# Altium PCB Dashboard_10.0.PcbDoc (part 1 of 3)
Units mm, origin at the board's own origin, x right, y up, seen from the top; angles counter-clockwise.
Board outline 113 x 67 mm, 2 copper layers (Top Layer, Bottom Layer), stack 1.671 mm thick; 178 components, 204 nets, 614 pads, 115 vias.
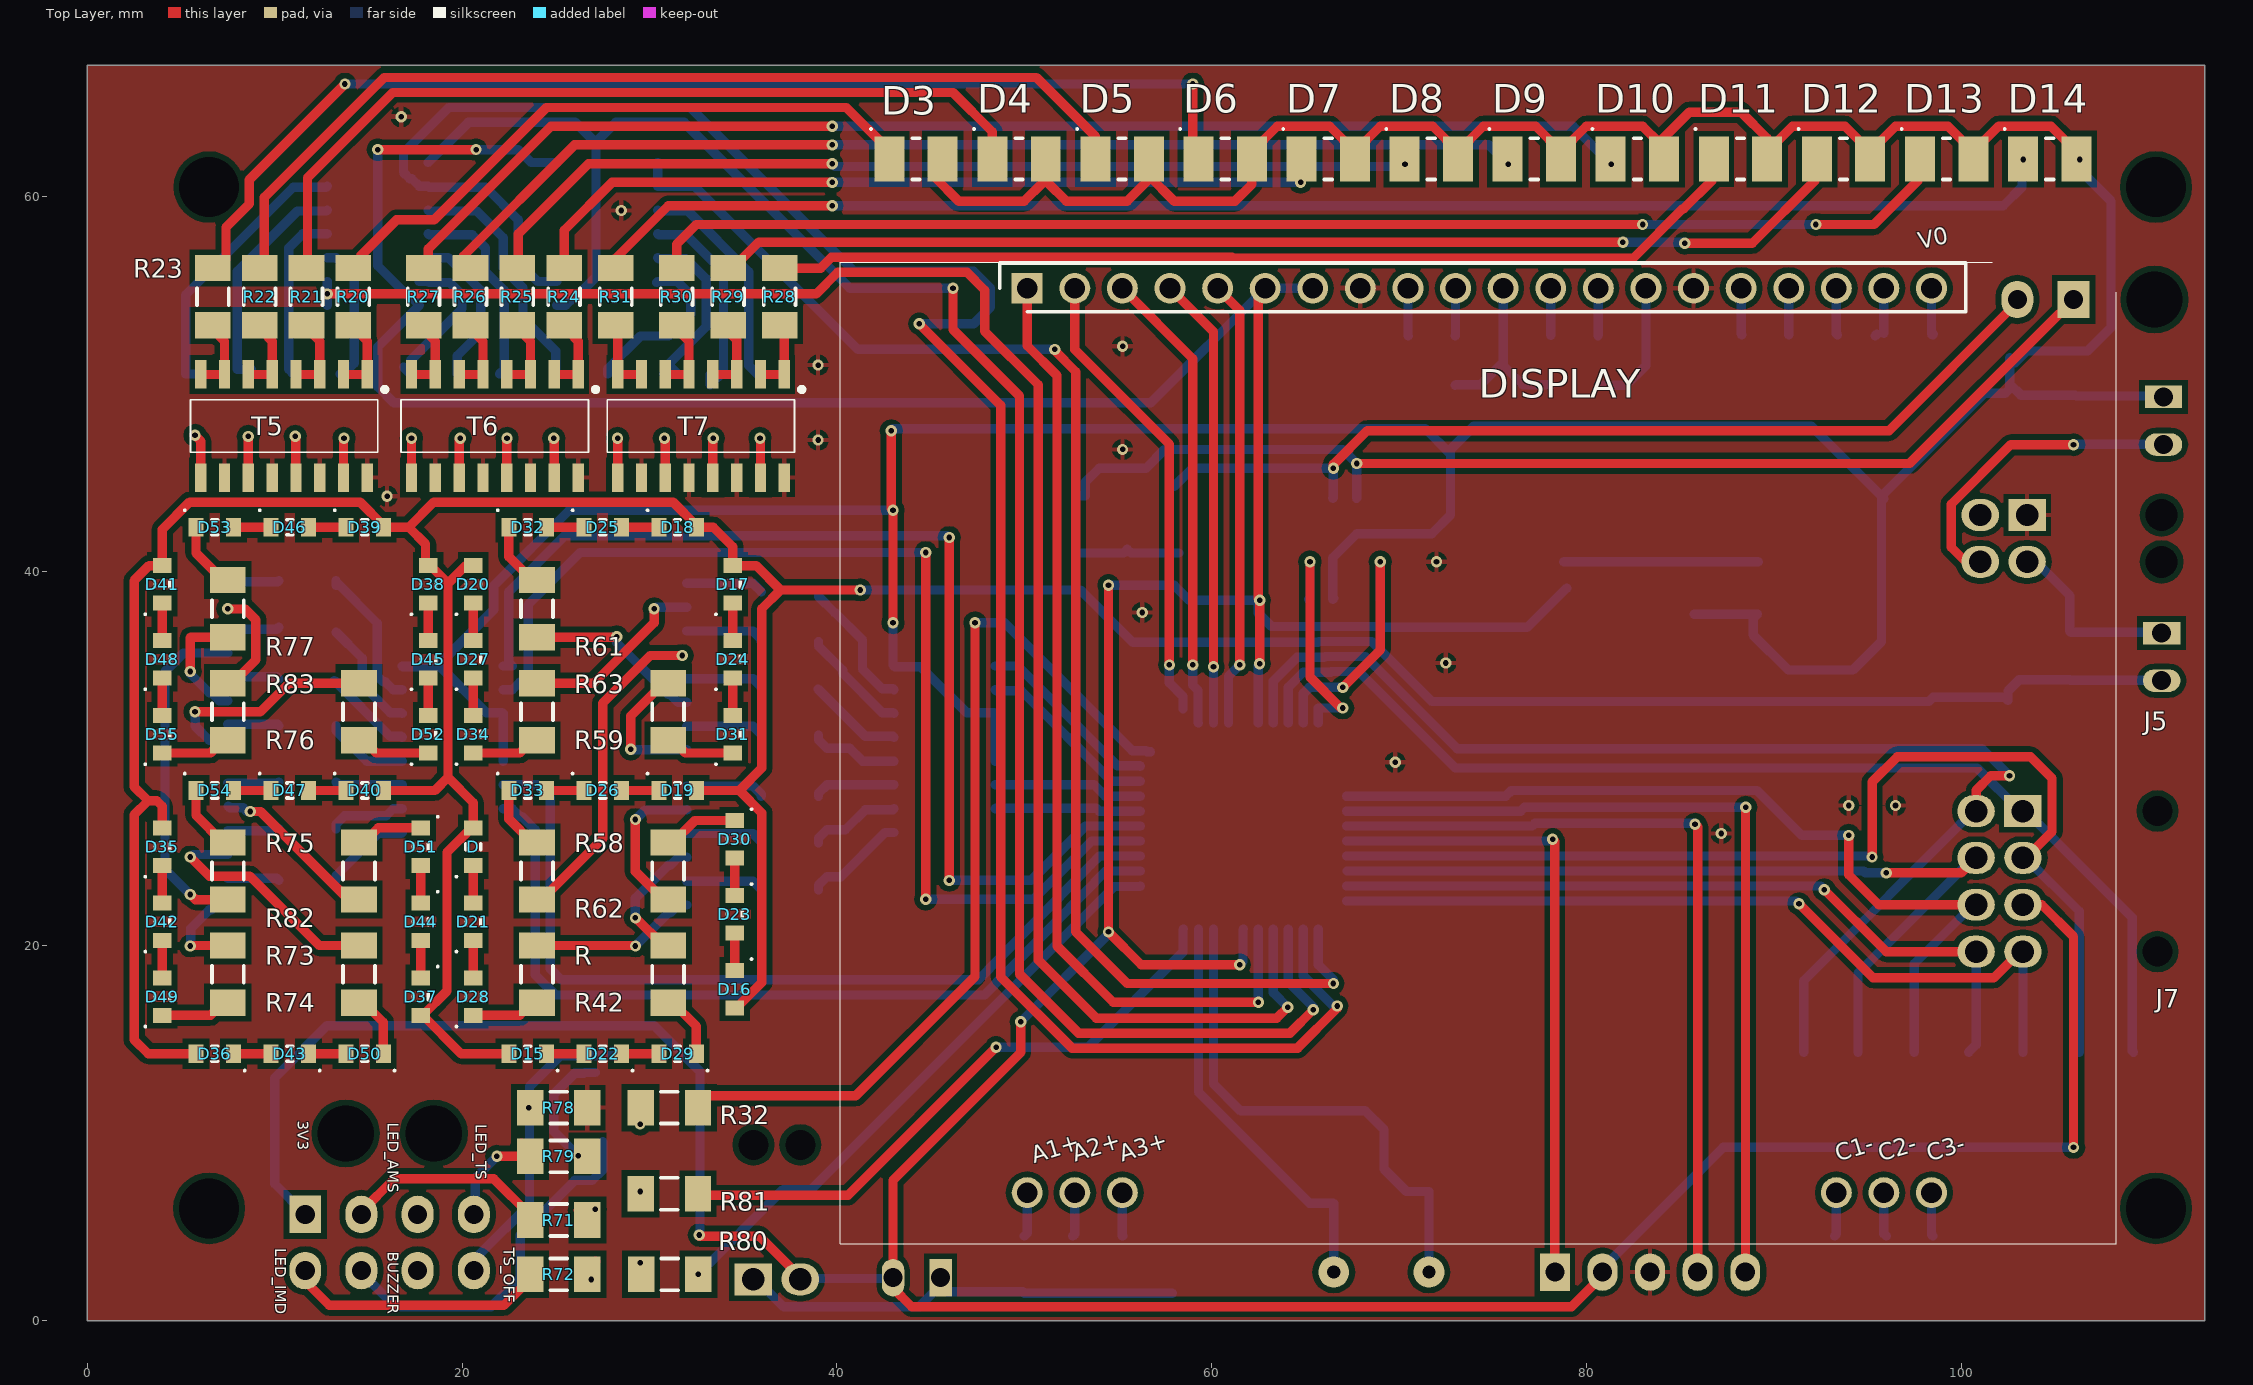
[diagram p0: Top Layer view]
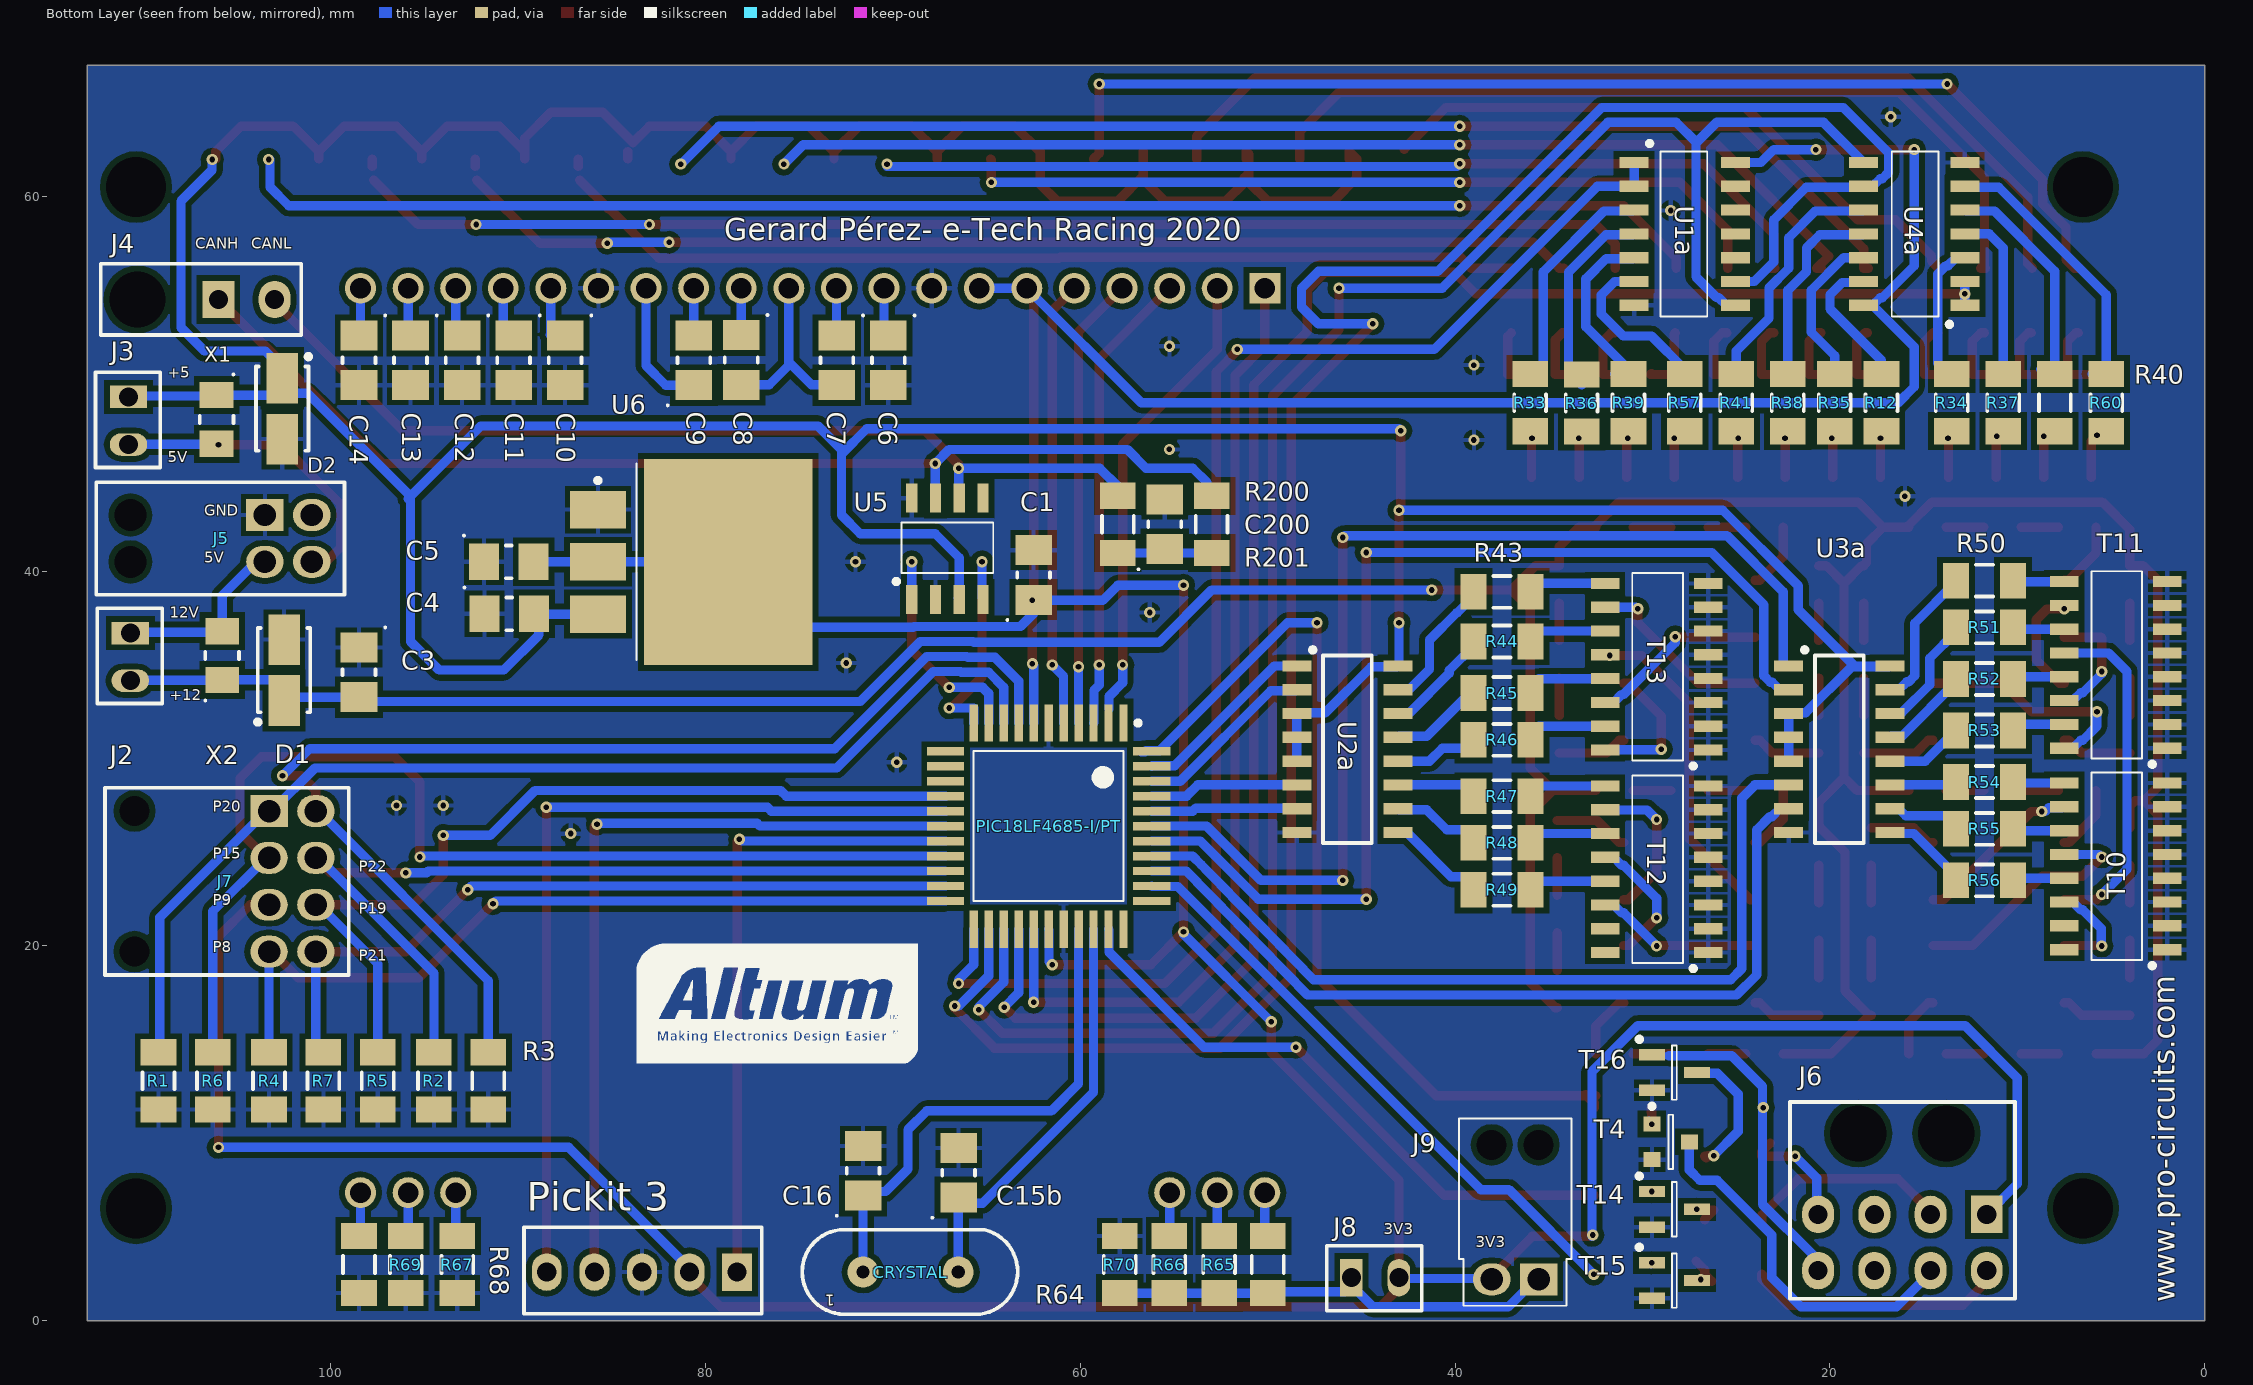
[diagram p1: Bottom Layer view, seen from below]

## Layer stack, top to bottom
Top Solder: solder mask 0.0102, Solder Resist, Dk 3.5
Top Layer: signal copper 0.0356
Dielectric 1: dielectric 1.6, FR-4, Dk 4.8
Bottom Layer: signal copper 0.0356
Bottom Solder: solder mask 0.0102, Solder Resist, Dk 3.5

## Board outline
0,0 113,0 113,67 0,67

## Design rules (kind name [scope] priority, off if disabled: settings)
Clearance [All] p1: gap=0.3 ignorepadtopadclearanceinfootprint=FALSE
HoleSize [All] p1: absolutevalues=TRUE maxlimit=3.3 minlimit=0.025 maxpercent=80.000 minpercent=20.000
MinimumSolderMaskSliver [All] p1: minsoldermaskwidth=0.1
PolygonConnect [All] p1: connectstyle=Relief reliefconductorwidth=0.254 reliefentries=4 polygonreliefangle="90 Angle" airgapwidth=0.254
RoutingVias [All] p1: holewidth=0.3 width=0.6 viastyle="Through Hole" minholewidth=0.3 minwidth=0.6 maxholewidth=0.3 maxwidth=0.6
SilkToSilkClearance [All] p1: silktosilkclearance=0.1
SilkToSolderMaskClearance [IsPad] p1: minsilkscreentomaskgap=0.1 clearancetoexposedcopper=TRUE
SolderMaskExpansion [All] p1: expansion=0.102
Width [All] p1: maxlimit=1 minlimit=0.3 preferedwidth=0.5
26 further rules are at their usual default settings.

## Components (designator, comment, footprint, x,y, rotation, side; value= is the part's Value field where it differs from the comment)
C1 "TAJA105K020RNJ" Chip2PinSM127P600-8N(condensador) 62.5,39.8 r90 bottom
C3 "TAJA105K020RNJ" Chip2PinSM127P600-8N(condensador) 98.5,34.6 r270 bottom
C4 "TAJA105K020RNJ" Chip2PinSM127P600-8N(condensador) 90.475,37.725 r180 bottom
C5 "TAJA105K020RNJ" Chip2PinSM127P600-8N(condensador) 90.5,40.5 r180 bottom
C6 "TAJA105K020RNJ" Chip2PinSM127P600-8N(condensador) 70.25,51.25 r270 bottom
C7 "TAJA105K020RNJ" Chip2PinSM127P600-8N(condensador) 73,51.25 r270 bottom locked
C8 "TAJA105K020RNJ" Chip2PinSM127P600-8N(condensador) 78.1,51.275 r270 bottom locked
C9 "TAJA105K020RNJ" Chip2PinSM127P600-8N(condensador) 80.625,51.25 r90 bottom locked
C10 "TAJA105K020RNJ" Chip2PinSM127P600-8N(condensador) 87.5,51.25 r270 bottom
C11 "TAJA105K020RNJ" Chip2PinSM127P600-8N(condensador) 90.25,51.25 r270 bottom
C12 "TAJA105K020RNJ" Chip2PinSM127P600-8N(condensador) 93,51.25 r270 bottom
C13 "TAJA105K020RNJ" Chip2PinSM127P600-8N(condensador) 95.75,51.25 r270 bottom
C14 "TAJA105K020RNJ" Chip2PinSM127P600-8N(condensador) 98.5,51.25 r270 bottom
C15b "TAJA105K020RNJ" Chip2PinSM127P600-8N(condensador) 66.5,7.9 r90 bottom
C16 "TAJA105K020RNJ" Chip2PinSM127P600-8N(condensador) 71.6,8 r90 bottom
C200 "TAJA105K020RNJ" Chip2PinSM127P600-8N(condensador) 55.5,42.5 r90 bottom
CRYSTAL "CRYSTAL" CRYSTAL 71.6,2.6 r0 bottom
D "150224GS73100" Chip2PinSM127P600-8N 20.6,25.3 r90 top locked
D1 "SMAJ12CA" DIODE 102.375,44.525 r270 bottom
D2 "SMAJ12CA" DIODE 102.725,38.875 r90 bottom
D3 "150141GS73100" Chip2PinSM127P600-8N(Buzz) 44.225,62 r0 top
D4 "150141GS73100" Chip2PinSM127P600-8N(Buzz) 49.725,62 r0 top
D5 "150141GS73100" Chip2PinSM127P600-8N(Buzz) 55.225,62 r0 top
D6 "150141GS73100" Chip2PinSM127P600-8N(Buzz) 60.725,62 r0 top
D7 "150141GS73100" Chip2PinSM127P600-8N(Buzz) 66.225,62 r0 top
D8 "150141GS73100" Chip2PinSM127P600-8N(Buzz) 71.725,62 r0 top
D9 "150141GS73100" Chip2PinSM127P600-8N(Buzz) 77.225,62 r0 top
D10 "150141GS73100" Chip2PinSM127P600-8N(Buzz) 82.725,62 r0 top
D11 "150141GS73100" Chip2PinSM127P600-8N(Buzz) 88.225,62 r0 top
D12 "150141GS73100" Chip2PinSM127P600-8N(Buzz) 93.725,62 r0 top
D13 "150141GS73100" Chip2PinSM127P600-8N(Buzz) 99.225,62 r0 top
D14 "150141GS73100" Chip2PinSM127P600-8N(Buzz) 104.725,62 r0 top
D15 "150224GS73100" Chip2PinSM127P600-8N 23.5,14.25 r180 top locked
D16 "150224GS73100" Chip2PinSM127P600-8N 34.55,17.7 r270 top locked
D17 "150224GS73100" Chip2PinSM127P600-8N 34.45,39.3 r90 top locked
D18 "150224GS73100" Chip2PinSM127P600-8N 31.5,42.35 r0 top locked
D19 "150224GS73100" Chip2PinSM127P600-8N 31.5,28.3 r0 top locked
D20 "150224GS73100" Chip2PinSM127P600-8N 20.6,39.3 r90 top locked
D21 "150224GS73100" Chip2PinSM127P600-8N 20.6,21.3 r90 top locked
D22 "150224GS73100" Chip2PinSM127P600-8N 27.5,14.25 r180 top locked
D23 "150224GS73100" Chip2PinSM127P600-8N 34.55,21.7 r270 top locked
D24 "150224GS73100" Chip2PinSM127P600-8N 34.45,35.3 r90 top locked
D25 "150224GS73100" Chip2PinSM127P600-8N 27.5,42.35 r0 top locked
D26 "150224GS73100" Chip2PinSM127P600-8N 27.5,28.3 r0 top locked
D27 "150224GS73100" Chip2PinSM127P600-8N 20.6,35.3 r90 top locked
D28 "150224GS73100" Chip2PinSM127P600-8N 20.6,17.3 r90 top locked
D29 "150224GS73100" Chip2PinSM127P600-8N 31.5,14.25 r180 top locked
D30 "150224GS73100" Chip2PinSM127P600-8N 34.55,25.7 r270 top locked
D31 "150224GS73100" Chip2PinSM127P600-8N 34.45,31.3 r90 top locked
D32 "150224GS73100" Chip2PinSM127P600-8N 23.5,42.35 r0 top locked
D33 "150224GS73100" Chip2PinSM127P600-8N 23.5,28.3 r0 top locked
D34 "150224GS73100" Chip2PinSM127P600-8N 20.6,31.3 r90 top locked
D35 "150224GS73100" Chip2PinSM127P600-8N 4,25.3 r90 top locked
D36 "150224GS73100" Chip2PinSM127P600-8N 6.8,14.25 r180 top locked
D37 "150224GS73100" Chip2PinSM127P600-8N 17.8,17.3 r270 top locked
D38 "150224GS73100" Chip2PinSM127P600-8N 18.2,39.3 r90 top locked
D39 "150224GS73100" Chip2PinSM127P600-8N 14.8,42.35 r0 top locked
D40 "150224GS73100" Chip2PinSM127P600-8N 14.8,28.3 r0 top locked
D41 "150224GS73100" Chip2PinSM127P600-8N 4,39.3 r90 top locked
D42 "150224GS73100" Chip2PinSM127P600-8N 4,21.3 r90 top locked
D43 "150224GS73100" Chip2PinSM127P600-8N 10.8,14.25 r180 top locked
D44 "150224GS73100" Chip2PinSM127P600-8N 17.8,21.3 r270 top locked
D45 "150224GS73100" Chip2PinSM127P600-8N 18.2,35.3 r90 top locked
D46 "150224GS73100" Chip2PinSM127P600-8N 10.8,42.35 r0 top locked
D47 "150224GS73100" Chip2PinSM127P600-8N 10.8,28.3 r0 top locked
D48 "150224GS73100" Chip2PinSM127P600-8N 4,35.3 r90 top locked
D49 "150224GS73100" Chip2PinSM127P600-8N 4,17.3 r90 top locked
D50 "150224GS73100" Chip2PinSM127P600-8N 14.8,14.25 r180 top locked
D51 "150224GS73100" Chip2PinSM127P600-8N 17.8,25.3 r270 top locked
D52 "150224GS73100" Chip2PinSM127P600-8N 18.2,31.3 r90 top locked
D53 "150224GS73100" Chip2PinSM127P600-8N 6.8,42.35 r0 top locked
D54 "150224GS73100" Chip2PinSM127P600-8N 6.8,28.3 r0 top locked
D55 "150224GS73100" Chip2PinSM127P600-8N 4,31.3 r90 top locked
DISPLAY "M20-7820442" DISPLAY 60.69,46.85 r0 top locked
J2 "68001-202HLF" J2 110.7,36.7 r180 bottom
J3 "68001-202HLF" J3 110.8,49.3 r180 bottom
J4 "43045-0200" J4 106,54.5 r90 bottom
J5 "1053141104" J5 103.52,43 r180 bottom
J6 "43045-0800" J6 11.63,5.675 r270 bottom
J7 "105314-1108" J7 103.3,27.2 r180 bottom
J8 "68001-202HLF" J8 45.54,2.3 r90 bottom
J9 "105313-1202" J9 36.8,5.8 r0 bottom
PIC18LF4685-I/PT "PIC18LF4685-I/PT" TQFP80P1200X1200X120-44N 61.7,26.4 r270 bottom
"Pickit 3" "TLW-105-01-G-S" J1 78.32,2.6 r270 bottom
R "ERJ-8GEYJ151V" ERJ-8GEYJ102V 24,18.5 r270 top locked
R1 "CRCW120610K0JNTA-ND" ERJ-8GEYJ102V 109.2,12.8 r90 bottom
R2 "CRCW120610K0JNTA-ND" ERJ-8GEYJ102V 94.5,12.8 r90 bottom
R3 "CRCW120610K0JNTA-ND" ERJ-8GEYJ102V 91.6,12.8 r90 bottom
R4 "CRCW120610K0JNTA-ND" ERJ-8GEYJ102V 103.3,12.8 r90 bottom
R5 "CRCW120610K0JNTA-ND" ERJ-8GEYJ102V 97.5,12.8 r90 bottom
R6 "CRCW120610K0JNTA-ND" ERJ-8GEYJ102V 106.3,12.8 r90 bottom
R7 "CRCW120610K0JNTA-ND" ERJ-8GEYJ102V 100.4,12.8 r90 bottom
R12 "ERJ-8GEYJ102V" ERJ-8GEYJ102V 17.25,49 r270 bottom
R20 "ERJ-8GEYJ151V" ERJ-8GEYJ102V 14.2,54.65 r270 top
R21 "ERJ-8GEYJ151V" ERJ-8GEYJ102V 11.7,54.65 r270 top
R22 "ERJ-8GEYJ151V" ERJ-8GEYJ102V 9.2,54.65 r270 top
R23 "ERJ-8GEYJ151V" ERJ-8GEYJ102V 6.7,54.65 r270 top
R24 "ERJ-8GEYJ151V" ERJ-8GEYJ102V 25.45,54.65 r270 top
R25 "ERJ-8GEYJ151V" ERJ-8GEYJ102V 22.95,54.65 r270 top
R26 "ERJ-8GEYJ151V" ERJ-8GEYJ102V 20.45,54.65 r270 top
R27 "ERJ-8GEYJ151V" ERJ-8GEYJ102V 17.95,54.65 r270 top
R28 "ERJ-8GEYJ151V" ERJ-8GEYJ102V 36.95,54.65 r270 top
R29 "ERJ-8GEYJ151V" ERJ-8GEYJ102V 34.2,54.65 r270 top
R30 "ERJ-8GEYJ151V" ERJ-8GEYJ102V 31.45,54.65 r270 top
R31 "ERJ-8GEYJ151V" ERJ-8GEYJ102V 28.2,54.65 r270 top
R32 "ERJ-8GEYJ102V" ERJ-8GEYJ102V 31.06,11.375 r180 top
R33 "ERJ-8GEYJ102V" ERJ-8GEYJ102V 36,49 r90 bottom
R34 "ERJ-8GEYJ102V" ERJ-8GEYJ102V 13.5,49 r90 bottom
R35 "ERJ-8GEYJ102V" ERJ-8GEYJ102V 19.75,49 r270 bottom
R36 "ERJ-8GEYJ102V" ERJ-8GEYJ102V 33.25,48.975 r90 bottom
R37 "ERJ-8GEYJ102V" ERJ-8GEYJ102V 10.75,49 r90 bottom
R38 "ERJ-8GEYJ102V" ERJ-8GEYJ102V 22.25,49 r270 bottom
R39 "ERJ-8GEYJ102V" ERJ-8GEYJ102V 30.75,49 r90 bottom
R40 "ERJ-8GEYJ102V" ERJ-8GEYJ102V 8,49 r90 bottom
R41 "ERJ-8GEYJ102V" ERJ-8GEYJ102V 25,49 r270 bottom
R42 "ERJ-8GEYJ151V" ERJ-8GEYJ102V 31,18.5 r270 top locked
R43 "ERJ-8GEYJ102V" ERJ-8GEYJ102V 37.5,38.9 r180 bottom
R44 "ERJ-8GEYJ102V" ERJ-8GEYJ102V 37.5,36.25 r180 bottom
R45 "ERJ-8GEYJ102V" ERJ-8GEYJ102V 37.5,33.5 r180 bottom
R46 "ERJ-8GEYJ102V" ERJ-8GEYJ102V 37.5,31 r180 bottom
R47 "ERJ-8GEYJ102V" ERJ-8GEYJ102V 37.5,28 r180 bottom
R48 "ERJ-8GEYJ102V" ERJ-8GEYJ102V 37.5,25.5 r180 bottom
R49 "ERJ-8GEYJ102V" ERJ-8GEYJ102V 37.5,23 r180 bottom
R50 "ERJ-8GEYJ102V" ERJ-8GEYJ102V 11.75,39.5 r180 bottom
R51 "ERJ-8GEYJ102V" ERJ-8GEYJ102V 11.75,37 r180 bottom
R52 "ERJ-8GEYJ102V" ERJ-8GEYJ102V 11.75,34.25 r180 bottom
R53 "ERJ-8GEYJ102V" ERJ-8GEYJ102V 11.75,31.5 r180 bottom
R54 "ERJ-8GEYJ102V" ERJ-8GEYJ102V 11.75,28.75 r180 bottom
R55 "ERJ-8GEYJ102V" ERJ-8GEYJ102V 11.75,26.25 r180 bottom
R56 "ERJ-8GEYJ102V" ERJ-8GEYJ102V 11.75,23.5 r180 bottom
R57 "ERJ-8GEYJ102V" ERJ-8GEYJ102V 27.75,49 r90 bottom
R58 "ERJ-8GEYJ151V" ERJ-8GEYJ102V 31,24 r90 top locked
R59 "ERJ-8GEYJ151V" ERJ-8GEYJ102V 31,32.5 r270 top locked
R60 "ERJ-8GEYJ102V" ERJ-8GEYJ102V 5.25,49 r90 bottom
R61 "ERJ-8GEYJ151V" ERJ-8GEYJ102V 24,38 r90 top locked
R62 "ERJ-8GEYJ151V" ERJ-8GEYJ102V 24,24 r90 top locked
R63 "ERJ-8GEYJ151V" ERJ-8GEYJ102V 24,32.5 r270 top locked
R64 "ERJ-8GEYJ102V" ERJ-8GEYJ102V 50,3 r90 bottom locked
R65 "ERJ-8GEYJ102V" ERJ-8GEYJ102V 52.6,3 r90 bottom locked
R66 "ERJ-8GEYJ102V" ERJ-8GEYJ102V 55.25,3 r90 bottom locked
R67 "ERJ-8GEYJ102V" ERJ-8GEYJ102V 93.25,3 r270 bottom locked
R68 "ERJ-8GEYJ102V" ERJ-8GEYJ102V 98.5,3 r270 bottom locked
R69 "ERJ-8GEYJ102V" ERJ-8GEYJ102V 96,3 r270 bottom locked
R70 "CRCW120610K0JNTA-ND" ERJ-8GEYJ102V 57.9,3 r90 bottom locked
R71 "ERJ-8GEYJ151V" ERJ-8GEYJ102V 25.16,5.375 r180 top
R72 "ERJ-8GEYJ151V" ERJ-8GEYJ102V 25.16,2.475 r180 top
R73 "ERJ-8GEYJ151V" ERJ-8GEYJ102V 7.5,18.5 r270 top locked
R74 "ERJ-8GEYJ151V" ERJ-8GEYJ102V 14.5,18.5 r270 top locked
R75 "ERJ-8GEYJ151V" ERJ-8GEYJ102V 14.5,24 r90 top locked
R76 "ERJ-8GEYJ151V" ERJ-8GEYJ102V 14.5,32.5 r270 top locked
R77 "ERJ-8GEYJ151V" ERJ-8GEYJ102V 7.5,38 r90 top locked
R78 "CRCW120610K0JNTA-ND" ERJ-8GEYJ102V 25.16,11.375 r180 top
R79 "ERJ-8GEYJ151V" ERJ-8GEYJ102V 25.16,8.775 r180 top
R80 "ERJ-8GEYJ102V" ERJ-8GEYJ102V 31.085,2.475 r180 top
R81 "ERJ-8GEYJ102V" ERJ-8GEYJ102V 31.06,6.775 r180 top
R82 "ERJ-8GEYJ151V" ERJ-8GEYJ102V 7.5,24 r90 top locked
R83 "ERJ-8GEYJ151V" ERJ-8GEYJ102V 7.5,32.5 r270 top locked
R200 "ERJ-8GEYJ151V" ERJ-8GEYJ102V 53,42.5 r270 bottom
R201 "ERJ-8GEYJ151V" ERJ-8GEYJ102V 58,42.5 r270 bottom
T4 "BC817-25LT1G" SOT190P240X100-3N 28.5,9.546 r180 bottom
T5 "MMPQ2222A" SOP127P600-8N(MMPQ2222A) 10.5,47.75 r270 top
T6 "MMPQ2222A" SOP127P600-8N(MMPQ2222A) 21.75,47.75 r270 top
T7 "MMPQ2222A" SOP127P600-8N(MMPQ2222A) 32.75,47.75 r270 top
T10 "MMPQ3906" SOP127P600-8N(MMPQ3906) 4.75,24.25 r0 bottom
T11 "MMPQ3906" SOP127P600-8N(MMPQ3906) 4.75,35 r0 bottom
T12 "MMPQ3906" SOP127P600-8N(MMPQ3906) 29.25,24.095 r0 bottom
T13 "MMPQ3906" SOP127P600-8N(MMPQ3906) 29.25,34.905 r0 bottom
T14 "CPH3455-TL-H" SOT190P280X90-3N 28.3,5.946 r180 bottom
T15 "CPH3455-TL-H" SOT190P280X90-3N 28.3,2.146 r180 bottom
T16 "CPH3455-TL-H" SOT190P280X90-3N 28.3,13.246 r180 bottom
U1a "SN74HC164D" SOP127P600-8N 27.75,58 r180 bottom
U2a "SN74LS47D" SOP127P620X175-16N 45.75,30.5 r180 bottom
U3a "SN74LS47D" SOP127P620X175-16N 19.5,30.5 r180 bottom
U4a "SN74HC164D" SOP127P600-8N 15.5,58 r0 bottom
U5 "MCP2561-I/SN" SOP127P600-8N(MCP2551) 67.1,41.2 r90 bottom
U6 "LT1086CM-3.3" TO228P970-3N 80.75,40.5 r180 bottom
X1 "FUSE 3A" Fuse 104.22,48.3 r90 bottom
X2 "Fuse 1A" Fuse 107.68,35.3 r270 bottom

## Footprints (in the part's own frame and the unit in brackets; to place one, negate y for a bottom-side part, rotate by r counter-clockwise, add the part's x,y. Pads: shape width x height; smd on the part's side, far side on the other; paste and mask are expansions set on the pad)
Chip2PinSM127P600-8N [mm]
  rect 0.8x1 smd: 1(-1,0) 2(1,0)
  silkscreen extent -1.65,-0.4 0.15,0.95, body extent -1.15,-0.7 1.15,0.7, height 1.31
Chip2PinSM127P600-8N(Buzz) [mm]
  rect 1.6x2.4 smd: 1(-1.425,0) 2(1.425,0)
  silkscreen extent -2.45,-1.1 0.2,1.65, body extent -1.75,-1.4 1.75,1.4, height 1.9
Chip2PinSM127P600-8N(condensador) [mm]
  rect 1.6x1.95 smd: 1(-1.325,0) 2(1.325,0)
  silkscreen extent -2.45,-0.87 0.15,1.45, body extent -1.7,-0.9 1.7,0.9, height 1.8
CRYSTAL [mil]
  round 65 hole 27.56: 1(0,0) 2(-200,0)
  silkscreen extent -325,-89 128,89
DIODE [mm]
  rect 2.7x1.68 smd: 1(11.425,-0.125) 2(8.175,-0.125)
  silkscreen extent 7.55,-1.65 12.7,1.27, body extent 7.55,-1.52 12.05,1.27, height 2.29
DISPLAY [mm]
  round 1.65 hole 1.1: 21(37.73,8.25) 22(35.19,8.25) 23(32.65,8.25) 24(30.11,8.25) 25(27.57,8.25) 26(25.03,8.25) 27(22.49,8.25) 28(19.95,8.25) 29(17.41,8.25) 30(14.87,8.25) 31(12.33,8.25) 32(9.79,8.25) 33(7.25,8.25) 34(4.71,8.25) 35(2.17,8.25) 36(-0.37,8.25) 37(-2.91,8.25) 38(-5.45,8.25) 39(-7.99,8.25) 41(-10.53,-40.01) 42(-7.99,-40.01) 43(-5.45,-40.01) 44(37.73,-40.01) 45(35.19,-40.01) 46(32.65,-40.01)
  rect 1.65x1.65 / inner round 1.65 / far side rect 1.65x1.65 hole 1.1: 40(-10.53,8.25)
  silkscreen extent -20.5,-42.75 47.6,9.65
ERJ-8GEYJ102V [mm] "Chip Resistor, 2-Leads, Body 3,20x1,60mm, IPC Medium Density"
  rect 1.4x1.9 smd: 1(-1.525,0) 2(1.525,0)
  silkscreen extent -0.45,-0.85 0.45,0.85, body extent -1.6,-0.8 1.6,0.8, height 0.6
Fuse [mm]
  rect 1.4x1.8 smd: 1(1.1,1.88) 2(-1.5,1.88)
  silkscreen extent -0.4,0.93 2.25,2.78, body extent -2.12,0.98 1.72,2.78, height 1.8
J1 [mm]
  rect 2x1.6 hole 1.02: 1(0,0)
  oval 2x1.6 hole 1.02: 2(0,-2.54) 3(0,-5.08) 4(0,-7.62) 5(0,-10.16)
  silkscreen extent -2.39,-11.38 2.22,1.32
J2 [mm]
  rect 2x1.2 hole 1.02: 1(0,0)
  oval 2x1.2 hole 1.02: 2(0,-2.54)
  silkscreen extent -1.77,-3.76 1.7,1.32
J3 [mm]
  rect 2x1.2 hole 1.02: 1(0,0)
  oval 2x1.2 hole 1.02: 2(0,-2.54)
  silkscreen extent -1.77,-3.76 1.7,1.32
J4 [mm]
  rect 2x1.7 hole 1.02: 1(0,0)
  oval 2x1.7 hole 1.02: 2(0,-3)
  oval 2x1.7 hole 3: 3(0,4.325)
  silkscreen extent -1.9,-4.42 1.91,6.27
J5 [mm]
  rect 2x1.7 hole 1.2: 1(0,0)
  oval 2x1.7 hole 1.2: 2(0,-2.5) 3(2.5,-2.5) 4(2.5,0)
  round 1.5 hole 1.7: 5(-7.18,0) 6(-7.18,-2.5)
  silkscreen extent -9,-4.25 4.25,1.75, body extent -10.38,-4.22 3.02,1.72, height 9.44
J6 [mm]
  rect 2x1.7 hole 1.02: 1(0,0)
  oval 2x1.7 hole 1.02: 2(0,-3) 3(0,-6) 4(0,-9) 5(3,-9) 6(3,-6) 7(3,-3) 8(3,0)
  oval 2x1.7 hole 3: 9(-4.32,-2.16) 10(-4.32,-6.86)
  silkscreen extent -6,-10.5 4.5,1.5
J7 [mm]
  rect 2x1.7 hole 1.2: 1(0,0)
  oval 2x1.7 hole 1.2: 2(0,-2.5) 3(0,-5) 4(0,-7.5) 5(2.5,-7.5) 6(2.5,-5) 7(2.5,-2.5) 8(2.5,0)
  round 1.2 hole 1.6: 9(-7.18,0) 10(-7.18,-7.5)
  silkscreen extent -8.75,-8.75 4.25,1.25, body extent -10.4,-9.26 3,1.68, height 9.44
J8 [mm]
  rect 2x1.2 hole 1.02: 1(0,0)
  oval 2x1.2 hole 1.02: 2(0,-2.54)
  silkscreen extent -1.77,-3.76 1.7,1.32
J9 [mm]
  rect 2x1.7 hole 1.2: 1(-1.25,3.59)
  oval 2x1.7 hole 1.2: 2(1.25,3.59)
  round 1.2 hole 1.6: 5(-1.25,-3.59) 6(1.25,-3.59)
  silkscreen extent -3,-5 3,5, body extent -3.05,-8.25 2.89,3.9, height 6.9
SOP127P600-8N [mm]
  rect 1.55x0.6 smd: 1(-2.7,3.81) 2(-2.7,2.54) 3(-2.7,1.27) 4(-2.7,0) 5(-2.7,-1.27) 6(-2.7,-2.54) 7(-2.7,-3.81) 8(2.7,-3.81) 9(2.7,-2.54) 10(2.7,-1.27) 11(2.7,0) 12(2.7,1.27) 13(2.7,2.54) 14(2.7,3.81)
  silkscreen extent -2,-4.4 1.2,4.95, body extent -2,-4.4 2,4.4, height 1.75
SOP127P600-8N(MCP2551) [mm]
  rect 1.55x0.6 smd: 1(-2.7,1.905) 2(-2.7,0.635) 3(-2.7,-0.635) 4(-2.7,-1.905) 5(2.7,-1.905) 6(2.7,-0.635) 7(2.7,0.635) 8(2.7,1.905)
  silkscreen extent -1.87,-2.45 1.4,2.85, body extent -1.95,-2.45 1.95,2.45, height 1.75
SOP127P600-8N(MMPQ2222A) [mm]
  rect 1.52x0.6 smd: 1(-2.75,4.445) 2(-2.75,3.175) 3(-2.75,1.905) 4(-2.75,0.635) 5(-2.75,-0.635) 6(-2.75,-1.905) 7(-2.75,-3.175) 8(-2.75,-4.445) 9(2.75,-4.445) 10(2.75,-3.175) 11(2.75,-1.905) 12(2.75,-0.635) 13(2.75,0.635) 14(2.75,1.905) 15(2.75,3.175) 16(2.75,4.445)
  silkscreen extent -2.07,-5 1.4,5.5, body extent -2,-5 2,5, height 1.75
SOP127P600-8N(MMPQ3906) [mm]
  rect 1.52x0.6 smd: 1(-2.75,4.445) 2(-2.75,3.175) 3(-2.75,1.905) 4(-2.75,0.635) 5(-2.75,-0.635) 6(-2.75,-1.905) 7(-2.75,-3.175) 8(-2.75,-4.445) 9(2.75,-4.445) 10(2.75,-3.175) 11(2.75,-1.905) 12(2.75,-0.635) 13(2.75,0.635) 14(2.75,1.905) 15(2.75,3.175) 16(2.75,4.445)
  silkscreen extent -2.07,-5 1.3,5.42, body extent -2,-5 2,5, height 1.75
SOP127P620X175-16N [mm] "SOP, 16-Leads, Body 10,00x4,00mm, Pitch 1,27mm, IPC Medium Density"
  rect 1.55x0.6 smd: 1(-2.7,4.445) 2(-2.7,3.175) 3(-2.7,1.905) 4(-2.7,0.635) 5(-2.7,-0.635) 6(-2.7,-1.905) 7(-2.7,-3.175) 8(-2.7,-4.445) 9(2.7,-4.445) 10(2.7,-3.175) 11(2.7,-1.905) 12(2.7,-0.635) 13(2.7,0.635) 14(2.7,1.905) 15(2.7,3.175) 16(2.7,4.445)
  silkscreen extent -1.97,-5 1.3,5.42, body extent -2,-5 2,5, height 1.75
SOT190P240X100-3N [mm] "SOT223, 3-Leads, Body 2,90x2,40mm (avg), Pitch 1,90mm, IPC Medium Density"
  rect 0.9x0.8 smd: 1(-1,0.95) 2(-1,-0.95) 3(1,0)
  silkscreen extent -1.13,-1.45 0.13,2.02, body extent -0.65,-1.45 0.65,1.45, height 1
SOT190P280X90-3N [mm] "SOT223, 3-Leads, Body 2,90x2,80mm (avg), Pitch 1,90mm, IPC Medium Density"
  rect 1.4x0.6 smd: 1(-1.2,0.95) 2(-1.2,-0.95) 3(1.2,0)
  silkscreen extent -2,-1.45 0.13,1.9, body extent -0.8,-1.45 0.8,1.45, height 0.9
TO228P970-3N [mm]
  rect 3x2 smd: 1(-5,-2.79) 2(-5,0) 3(-5,2.79)
  rect 9x11 smd: 4(1.95,0)
  silkscreen extent -5.13,-5.25 -2.95,5.25, body extent -3.8,-5.28 4.28,5.27, height 4.58
TQFP80P1200X1200X120-44N [mm] "TQFP, 44-Leads, Body 10,00x10,00mm, Pitch 0,80mm, IPC Medium Density"
  rect 2x0.45 smd: 1(-5.5,4) 2(-5.5,3.2) 3(-5.5,2.4) 4(-5.5,1.6) 5(-5.5,0.8) 6(-5.5,0) 7(-5.5,-0.8) 8(-5.5,-1.6) 9(-5.5,-2.4) 10(-5.5,-3.2) 11(-5.5,-4) 23(5.5,-4) 24(5.5,-3.2) 25(5.5,-2.4) 26(5.5,-1.6) 27(5.5,-0.8) 28(5.5,0) 29(5.5,0.8) 30(5.5,1.6) 31(5.5,2.4) 32(5.5,3.2) 33(5.5,4)
  rect 0.45x2 smd: 12(-4,-5.5) 13(-3.2,-5.5) 14(-2.4,-5.5) 15(-1.6,-5.5) 16(-0.8,-5.5) 17(0,-5.5) 18(0.8,-5.5) 19(1.6,-5.5) 20(2.4,-5.5) 21(3.2,-5.5) 22(4,-5.5) 34(4,5.5) 35(3.2,5.5) 36(2.4,5.5) 37(1.6,5.5) 38(0.8,5.5) 39(0,5.5) 40(-0.8,5.5) 41(-1.6,5.5) 42(-2.4,5.5) 43(-3.2,5.5) 44(-4,5.5)
  silkscreen extent -5.62,-4 4,4.9, body extent -5,-5 5,5, height 1.2

## Part data
C1 C3 C200: library part "CONDENSADOR 100nF", "CAP TANT 100nF 20V 10% 1206", Capacitance=1uF, Case/Package=1206, Case Code (Metric)=3216, Dielectric Material=Tantalum, ESR (Equivalent Series Resistance)=9R, Leakage Current=500nA, Manufacturer 1="Kyocera AVX", Max Operating Temperature=125°C, Min Operating Temperature=-55°C, Package Quantity=1, Supplier Part Number 1=478-1650-1-ND, Tolerance=20%, Voltage=20V, Case Code (Imperial)=1206, Category=condensador, ComponentLink1Description=https://datasheet.ciiva.com/12883/taj-27497-12883280.pdf?src-supplier=Mouser, ComponentLink1URL=https://datasheet.ciiva.com/12883/taj-27497-12883280.pdf?src-supplier=Mouser, ComponentLink2Description=https://datasheet.ciiva.com/11794/0900766b80ccdc61-11794382.pdf?src-supplier=RSComponents, ComponentLink2URL=https://datasheet.ciiva.com/11794/0900766b80ccdc61-11794382.pdf?src-supplier=RSComponents, ComponentLink3Description=https://datasheet.ciiva.com/263/taj-263412.pdf?src-supplier=Digi-Key, ComponentLink3URL=https://datasheet.ciiva.com/263/taj-263412.pdf?src-supplier=Digi-Key, ComponentLink4Description=https://datasheet.ciiva.com/3004/taj-3004372.pdf?src-supplier=Avnet, ComponentLink4URL=https://datasheet.ciiva.com/3004/taj-3004372.pdf?src-supplier=Avnet, ComponentLink5Description=https://datasheet.ciiva.com/263/taj-263414.pdf?src-supplier=Digi-Key, ComponentLink5URL=https://datasheet.ciiva.com/263/taj-263414.pdf?src-supplier=Digi-Key, ComponentLink6Description=https://datasheet.ciiva.com/263/taj-263413.pdf?src-supplier=Digi-Key, ComponentLink6URL=https://datasheet.ciiva.com/263/taj-263413.pdf?src-supplier=Digi-Key, ComponentLink7Description=https://datasheet.ciiva.com/3004/taj-3004373.pdf?src-supplier=Avnet, ComponentLink7URL=https://datasheet.ciiva.com/3004/taj-3004373.pdf?src-supplier=Avnet, ComponentLink8Description=https://datasheet.ciiva.com/14608/70001050-14608053.pdf?src-supplier=Allied+Electronics, ComponentLink8URL=https://datasheet.ciiva.com/14608/70001050-14608053.pdf?src-supplier=Allied+Electronics, ComponentLink9Description=https://datasheet.ciiva.com/14598/70001050-14598921.pdf?src-supplier=Allied+Electronics, ComponentLink9URL=https://datasheet.ciiva.com/14598/70001050-14598921.pdf?src-supplier=Allied+Electronics, ComponentLink10Description=https://datasheet.ciiva.com/16486/taj-16486073.pdf?src-supplier=Avnet+Asia, ComponentLink10URL=https://datasheet.ciiva.com/16486/taj-16486073.pdf?src-supplier=Avnet+Asia, ComponentLink11Description=https://datasheet.ciiva.com/16203/taj-16203563.pdf?src-supplier=Future+Electronics, ComponentLink11URL=https://datasheet.ciiva.com/16203/taj-16203563.pdf?src-supplier=Future+Electronics, Depth=1.6mm, Dissipation Factor=4%, Features="General Purpose", Height=1.6mm, Height - Seated (Max)=0.071inch, Lead Free="Lead Free", Length=3.2mm, Manufacturer Part Number 1=TAJA105K020RNJ, Mount="Surface Mount,PCB", Number of Pins=2, Packaging="Tape and Reel", Polarity=Polar, Pricing 1="1=0,31000, 10=0,21900, 100=0,13110, 500=0,09832, 1000=0,08303 (USD)", Radiation Hardening=No, REACH SVHC="No SVHC", RoHS=Yes, Stock 1=73338, Supplier 1=Digi-Key, Termination=SMD/SMT, Voltage Rating=20V, Voltage Rating (DC)=20V, Width=1.6mm
C4 C5: library part "CONDENSADOR 10uF", "CAP TANT 10uF 20V 10% 1206", Capacitance=1uF, Case/Package=1206, Case Code (Metric)=3216, Dielectric Material=Tantalum, ESR (Equivalent Series Resistance)=9R, Leakage Current=500nA, Manufacturer 1="Kyocera AVX", Max Operating Temperature=125°C, Min Operating Temperature=-55°C, Package Quantity=1, Supplier Part Number 1=478-1650-1-ND, Tolerance=20%, Voltage=20V, Case Code (Imperial)=1206, Category=condensador, ComponentLink1Description=https://datasheet.ciiva.com/12883/taj-27497-12883280.pdf?src-supplier=Mouser, ComponentLink1URL=https://datasheet.ciiva.com/12883/taj-27497-12883280.pdf?src-supplier=Mouser, ComponentLink2Description=https://datasheet.ciiva.com/11794/0900766b80ccdc61-11794382.pdf?src-supplier=RSComponents, ComponentLink2URL=https://datasheet.ciiva.com/11794/0900766b80ccdc61-11794382.pdf?src-supplier=RSComponents, ComponentLink3Description=https://datasheet.ciiva.com/263/taj-263412.pdf?src-supplier=Digi-Key, ComponentLink3URL=https://datasheet.ciiva.com/263/taj-263412.pdf?src-supplier=Digi-Key, ComponentLink4Description=https://datasheet.ciiva.com/3004/taj-3004372.pdf?src-supplier=Avnet, ComponentLink4URL=https://datasheet.ciiva.com/3004/taj-3004372.pdf?src-supplier=Avnet, ComponentLink5Description=https://datasheet.ciiva.com/263/taj-263414.pdf?src-supplier=Digi-Key, ComponentLink5URL=https://datasheet.ciiva.com/263/taj-263414.pdf?src-supplier=Digi-Key, ComponentLink6Description=https://datasheet.ciiva.com/263/taj-263413.pdf?src-supplier=Digi-Key, ComponentLink6URL=https://datasheet.ciiva.com/263/taj-263413.pdf?src-supplier=Digi-Key, ComponentLink7Description=https://datasheet.ciiva.com/3004/taj-3004373.pdf?src-supplier=Avnet, ComponentLink7URL=https://datasheet.ciiva.com/3004/taj-3004373.pdf?src-supplier=Avnet, ComponentLink8Description=https://datasheet.ciiva.com/14608/70001050-14608053.pdf?src-supplier=Allied+Electronics, ComponentLink8URL=https://datasheet.ciiva.com/14608/70001050-14608053.pdf?src-supplier=Allied+Electronics, ComponentLink9Description=https://datasheet.ciiva.com/14598/70001050-14598921.pdf?src-supplier=Allied+Electronics, ComponentLink9URL=https://datasheet.ciiva.com/14598/70001050-14598921.pdf?src-supplier=Allied+Electronics, ComponentLink10Description=https://datasheet.ciiva.com/16486/taj-16486073.pdf?src-supplier=Avnet+Asia, ComponentLink10URL=https://datasheet.ciiva.com/16486/taj-16486073.pdf?src-supplier=Avnet+Asia, ComponentLink11Description=https://datasheet.ciiva.com/16203/taj-16203563.pdf?src-supplier=Future+Electronics, ComponentLink11URL=https://datasheet.ciiva.com/16203/taj-16203563.pdf?src-supplier=Future+Electronics, Depth=1.6mm, Dissipation Factor=4%, Features="General Purpose", Height=1.6mm, Height - Seated (Max)=0.071inch, Lead Free="Lead Free", Length=3.2mm, Manufacturer Part Number 1=TAJA105K020RNJ, Mount="Surface Mount,PCB", Number of Pins=2, Packaging="Tape and Reel", Polarity=Polar, Pricing 1="1=0,31000, 10=0,21900, 100=0,13110, 500=0,09832, 1000=0,08303 (USD)", Radiation Hardening=No, REACH SVHC="No SVHC", RoHS=Yes, Stock 1=73338, Supplier 1=Digi-Key, Termination=SMD/SMT, Voltage Rating=20V, Voltage Rating (DC)=20V, Width=1.6mm
C6 C7 C8 C9 C10 C11 C12 C13 C14: library part "CONDENSADOR 1uF", "CAP TANT 1uF 20V 10% 1206", Capacitance=1uF, Case/Package=1206, Case Code (Metric)=3216, Dielectric Material=Tantalum, ESR (Equivalent Series Resistance)=9R, Leakage Current=500nA, Manufacturer 1="Kyocera AVX", Max Operating Temperature=125°C, Min Operating Temperature=-55°C, Package Quantity=1, Supplier Part Number 1=478-1650-1-ND, Tolerance=20%, Voltage=20V, Case Code (Imperial)=1206, Category=condensador, ComponentLink1Description=https://datasheet.ciiva.com/12883/taj-27497-12883280.pdf?src-supplier=Mouser, ComponentLink1URL=https://datasheet.ciiva.com/12883/taj-27497-12883280.pdf?src-supplier=Mouser, ComponentLink2Description=https://datasheet.ciiva.com/11794/0900766b80ccdc61-11794382.pdf?src-supplier=RSComponents, ComponentLink2URL=https://datasheet.ciiva.com/11794/0900766b80ccdc61-11794382.pdf?src-supplier=RSComponents, ComponentLink3Description=https://datasheet.ciiva.com/263/taj-263412.pdf?src-supplier=Digi-Key, ComponentLink3URL=https://datasheet.ciiva.com/263/taj-263412.pdf?src-supplier=Digi-Key, ComponentLink4Description=https://datasheet.ciiva.com/3004/taj-3004372.pdf?src-supplier=Avnet, ComponentLink4URL=https://datasheet.ciiva.com/3004/taj-3004372.pdf?src-supplier=Avnet, ComponentLink5Description=https://datasheet.ciiva.com/263/taj-263414.pdf?src-supplier=Digi-Key, ComponentLink5URL=https://datasheet.ciiva.com/263/taj-263414.pdf?src-supplier=Digi-Key, ComponentLink6Description=https://datasheet.ciiva.com/263/taj-263413.pdf?src-supplier=Digi-Key, ComponentLink6URL=https://datasheet.ciiva.com/263/taj-263413.pdf?src-supplier=Digi-Key, ComponentLink7Description=https://datasheet.ciiva.com/3004/taj-3004373.pdf?src-supplier=Avnet, ComponentLink7URL=https://datasheet.ciiva.com/3004/taj-3004373.pdf?src-supplier=Avnet, ComponentLink8Description=https://datasheet.ciiva.com/14608/70001050-14608053.pdf?src-supplier=Allied+Electronics, ComponentLink8URL=https://datasheet.ciiva.com/14608/70001050-14608053.pdf?src-supplier=Allied+Electronics, ComponentLink9Description=https://datasheet.ciiva.com/14598/70001050-14598921.pdf?src-supplier=Allied+Electronics, ComponentLink9URL=https://datasheet.ciiva.com/14598/70001050-14598921.pdf?src-supplier=Allied+Electronics, ComponentLink10Description=https://datasheet.ciiva.com/16486/taj-16486073.pdf?src-supplier=Avnet+Asia, ComponentLink10URL=https://datasheet.ciiva.com/16486/taj-16486073.pdf?src-supplier=Avnet+Asia, ComponentLink11Description=https://datasheet.ciiva.com/16203/taj-16203563.pdf?src-supplier=Future+Electronics, ComponentLink11URL=https://datasheet.ciiva.com/16203/taj-16203563.pdf?src-supplier=Future+Electronics, Depth=1.6mm, Dissipation Factor=4%, Features="General Purpose", Height=1.6mm, Height - Seated (Max)=0.071inch, Lead Free="Lead Free", Length=3.2mm, Manufacturer Part Number 1=TAJA105K020RNJ, Mount="Surface Mount,PCB", Number of Pins=2, Packaging="Tape and Reel", Polarity=Polar, Pricing 1="1=0,31000, 10=0,21900, 100=0,13110, 500=0,09832, 1000=0,08303 (USD)", Radiation Hardening=No, REACH SVHC="No SVHC", RoHS=Yes, Stock 1=73338, Supplier 1=Digi-Key, Termination=SMD/SMT, Voltage Rating=20V, Voltage Rating (DC)=20V, Width=1.6mm
C15b C16: library part "CONDENSADOR 15pF", "CAP TANT 15pF 20V 10% 1206", Capacitance=1uF, Case/Package=1206, Case Code (Metric)=3216, Dielectric Material=Tantalum, ESR (Equivalent Series Resistance)=9R, Leakage Current=500nA, Manufacturer 1="Kyocera AVX", Max Operating Temperature=125°C, Min Operating Temperature=-55°C, Package Quantity=1, Supplier Part Number 1=478-1650-1-ND, Tolerance=20%, Voltage=20V, Case Code (Imperial)=1206, Category=condensador, ComponentLink1Description=https://datasheet.ciiva.com/12883/taj-27497-12883280.pdf?src-supplier=Mouser, ComponentLink1URL=https://datasheet.ciiva.com/12883/taj-27497-12883280.pdf?src-supplier=Mouser, ComponentLink2Description=https://datasheet.ciiva.com/11794/0900766b80ccdc61-11794382.pdf?src-supplier=RSComponents, ComponentLink2URL=https://datasheet.ciiva.com/11794/0900766b80ccdc61-11794382.pdf?src-supplier=RSComponents, ComponentLink3Description=https://datasheet.ciiva.com/263/taj-263412.pdf?src-supplier=Digi-Key, ComponentLink3URL=https://datasheet.ciiva.com/263/taj-263412.pdf?src-supplier=Digi-Key, ComponentLink4Description=https://datasheet.ciiva.com/3004/taj-3004372.pdf?src-supplier=Avnet, ComponentLink4URL=https://datasheet.ciiva.com/3004/taj-3004372.pdf?src-supplier=Avnet, ComponentLink5Description=https://datasheet.ciiva.com/263/taj-263414.pdf?src-supplier=Digi-Key, ComponentLink5URL=https://datasheet.ciiva.com/263/taj-263414.pdf?src-supplier=Digi-Key, ComponentLink6Description=https://datasheet.ciiva.com/263/taj-263413.pdf?src-supplier=Digi-Key, ComponentLink6URL=https://datasheet.ciiva.com/263/taj-263413.pdf?src-supplier=Digi-Key, ComponentLink7Description=https://datasheet.ciiva.com/3004/taj-3004373.pdf?src-supplier=Avnet, ComponentLink7URL=https://datasheet.ciiva.com/3004/taj-3004373.pdf?src-supplier=Avnet, ComponentLink8Description=https://datasheet.ciiva.com/14608/70001050-14608053.pdf?src-supplier=Allied+Electronics, ComponentLink8URL=https://datasheet.ciiva.com/14608/70001050-14608053.pdf?src-supplier=Allied+Electronics, ComponentLink9Description=https://datasheet.ciiva.com/14598/70001050-14598921.pdf?src-supplier=Allied+Electronics, ComponentLink9URL=https://datasheet.ciiva.com/14598/70001050-14598921.pdf?src-supplier=Allied+Electronics, ComponentLink10Description=https://datasheet.ciiva.com/16486/taj-16486073.pdf?src-supplier=Avnet+Asia, ComponentLink10URL=https://datasheet.ciiva.com/16486/taj-16486073.pdf?src-supplier=Avnet+Asia, ComponentLink11Description=https://datasheet.ciiva.com/16203/taj-16203563.pdf?src-supplier=Future+Electronics, ComponentLink11URL=https://datasheet.ciiva.com/16203/taj-16203563.pdf?src-supplier=Future+Electronics, Depth=1.6mm, Dissipation Factor=4%, Features="General Purpose", Height=1.6mm, Height - Seated (Max)=0.071inch, Lead Free="Lead Free", Length=3.2mm, Manufacturer Part Number 1=TAJA105K020RNJ, Mount="Surface Mount,PCB", Number of Pins=2, Packaging="Tape and Reel", Polarity=Polar, Pricing 1="1=0,31000, 10=0,21900, 100=0,13110, 500=0,09832, 1000=0,08303 (USD)", Radiation Hardening=No, REACH SVHC="No SVHC", RoHS=Yes, Stock 1=73338, Supplier 1=Digi-Key, Termination=SMD/SMT, Voltage Rating=20V, Voltage Rating (DC)=20V, Width=1.6mm
D D15 D16 D17 D18 D19 D20 D21 D22 D23 D24 D25 D26 D27 D28 D29 D30 D31 D32 D33 D34 D35 D36 D37 D38 D39 D40 D41 D42 D43 D44 D45 D46 D47 D48 D49 D50 D51 D52 D53 D54 D55: library part LED_SEG, "LED GREEN CLEAR 2SMD 528NM", Manufacturer 1="Wurth Electronics", Supplier Part Number 1=732-11398-1-ND, ComponentLink1Description=https://katalog.we-online.de/led/datasheet/150224GS73100.pdf?src-supplier=Digi-Key, ComponentLink1URL=https://katalog.we-online.de/led/datasheet/150224GS73100.pdf?src-supplier=Digi-Key, Manufacturer Part Number 1=150224GS73100, Pricing 1="1=0,71000, 50=0,58400, 100=0,41800, 500=0,38100 (USD)", RoHS=No, Stock 1=697, Supplier 1=Digi-Key
D1 D2: library part DIODE, "TVS DIODE 12V 19.9V DO214AC", Breakdown Voltage=13.3V, Capacitance=800pF, Case/Package=SMA, Clamping Voltage=19.9V, Leakage Current=1uA, Manufacturer 1=Littelfuse, Max Breakdown Voltage=14.7V, Max Operating Temperature=150°C, Max Output Current=20.1A, Max Power Dissipation=3.3W, Min Operating Temperature=-65°C, Operating Supply Voltage=12V, Package Quantity=5000, Peak Pulse Power=400W, Power Line Protection=No, Supplier Part Number 1=SMAJ12CALFCT-ND, Test Current=1mA, Category=Diode, ComponentLink1Description=https://datasheet.ciiva.com/14162/smaj-eng-ds-14162034.pdf?src-supplier=Distrelec, ComponentLink1URL=https://datasheet.ciiva.com/14162/smaj-eng-ds-14162034.pdf?src-supplier=Distrelec, ComponentLink2Description=https://datasheet.ciiva.com/25624/0900766b810f4edb-25624831.pdf?src-supplier=RSComponents, ComponentLink2URL=https://datasheet.ciiva.com/25624/0900766b810f4edb-25624831.pdf?src-supplier=RSComponents, ComponentLink3Description=https://datasheet.ciiva.com/331/littelfuse-tvs-diode-smaj-datasheet-pdf-331080.pdf?src-supplier=Digi-Key, ComponentLink3URL=https://datasheet.ciiva.com/331/littelfuse-tvs-diode-smaj-datasheet-pdf-331080.pdf?src-supplier=Digi-Key, ComponentLink4Description=https://datasheet.ciiva.com/8062/littelfuse-tvs-diode-smaj-8062265.pdf?src-supplier=Element14, ComponentLink4URL=https://datasheet.ciiva.com/8062/littelfuse-tvs-diode-smaj-8062265.pdf?src-supplier=Element14, ComponentLink5Description=https://datasheet.ciiva.com/4511/littelfuse-tvs-diode-smaj-23503-4511037.pdf?src-supplier=Mouser, ComponentLink5URL=https://datasheet.ciiva.com/4511/littelfuse-tvs-diode-smaj-23503-4511037.pdf?src-supplier=Mouser, ComponentLink6Description=https://datasheet.ciiva.com/28473/607617-28473381.pdf?src-supplier=Element14, ComponentLink6URL=https://datasheet.ciiva.com/28473/607617-28473381.pdf?src-supplier=Element14, ComponentLink7Description=https://datasheet.ciiva.com/331/littelfuse-tvs-diode-smaj-datasheet-pdf-331078.pdf?src-supplier=Digi-Key, ComponentLink7URL=https://datasheet.ciiva.com/331/littelfuse-tvs-diode-smaj-datasheet-pdf-331078.pdf?src-supplier=Digi-Key, ComponentLink8Description=https://datasheet.ciiva.com/331/littelfuse-tvs-diode-smaj-datasheet-pdf-331079.pdf?src-supplier=Digi-Key, ComponentLink8URL=https://datasheet.ciiva.com/331/littelfuse-tvs-diode-smaj-datasheet-pdf-331079.pdf?src-supplier=Digi-Key, Composition=Zener, Direction=Bidirectional, Element Configuration=Single, Height=2.087mm, Lead Free="Lead Free", Length=4.5mm, Manufacturer Part Number 1=SMAJ12CA, Max Reverse Leakage Current=1uA, Max Surge Current=20.1A, Min Breakdown Voltage=13.3V, Mount="Surface Mount", Number of Bidirectional Channels=1, Number of Channels=1, Number of Elements=1, Number of Pins=2, Packaging="Tape and Reel", Peak Pulse Current=20.1A, Polarity=Bidirectional, Power Dissipation=400W, Pricing 1="1=0,45000, 10=0,33900, 25=0,30520, 100=0,16100, 250=0,15928, 500=0,14264, 1000=0,11100, 2500=0,10156 (USD)", Radiation Hardening=No, REACH SVHC="No SVHC", Reverse Breakdown Voltage=13.3V, Reverse Standoff Voltage=12V, RoHS=Yes, Stock 1=18116, Supplier 1=Digi-Key, Termination=SMD/SMT, Voltage Rating (DC)=12V, Width=2.79mm
D3 D4 D5 D6 D7 D8 D9 D10 D11 D12 D13 D14: library part LED, "WURTH ELEKTRONIK   150141GS73100   LED, 1411, GREEN, 1000MCD, 525NM", Case/Package=3528, Case Code (Imperial)=1411, Color=Green, Forward Current=30mA, Forward Voltage=3.1V, Manufacturer 1="Wurth Electronics", Max Operating Temperature=85°C, Min Operating Temperature=-40°C, Package Quantity=2000, Supplier Part Number 1=732-4997-1-ND, Test Current=20mA, Case Code (Metric)=3528, ComponentLink1Description=https://datasheet.ciiva.com/23843/150141gs73100-23843266.pdf?src-supplier=Newark, ComponentLink1URL=https://datasheet.ciiva.com/23843/150141gs73100-23843266.pdf?src-supplier=Newark, ComponentLink2Description=https://datasheet.ciiva.com/29278/759463-da-01-en-smd-topled-einf-gruen-150141gs73100-29278953.pdf?src-supplier=Conrad, ComponentLink2URL=https://datasheet.ciiva.com/29278/759463-da-01-en-smd-topled-einf-gruen-150141gs73100-29278953.pdf?src-supplier=Conrad, ComponentLink3Description=https://datasheet.ciiva.com/22656/1911484-22656997.pdf?src-supplier=Element14, ComponentLink3URL=https://datasheet.ciiva.com/22656/1911484-22656997.pdf?src-supplier=Element14, ComponentLink4Description=https://datasheet.ciiva.com/29563/150141gs73100-29563029.pdf?src-supplier=Digi-Key, ComponentLink4URL=https://datasheet.ciiva.com/29563/150141gs73100-29563029.pdf?src-supplier=Digi-Key, ComponentLink5Description=https://datasheet.ciiva.com/29563/150141gs73100-29563030.pdf?src-supplier=Digi-Key, ComponentLink5URL=https://datasheet.ciiva.com/29563/150141gs73100-29563030.pdf?src-supplier=Digi-Key, ComponentLink6Description=https://datasheet.ciiva.com/48430/150141gs73100-eng-tds-48430060.pdf?src-supplier=Distrelec, ComponentLink6URL=https://datasheet.ciiva.com/48430/150141gs73100-eng-tds-48430060.pdf?src-supplier=Distrelec, Dominant Wavelength=525nm, Height=1.9mm, Lead Free="Lead Free", Length=3.5mm, Lens Style=Clear,Round, Luminous Intensity=1000mcd, Manufacturer Part Number 1=150141GS73100, Mount="Surface Mount", Packaging="Cut Tape", Pricing 1="1=0,18000, 50=0,17600, 100=0,15300, 500=0,11700 (USD)", REACH SVHC=Unknown, RoHS=Yes, Stock 1=10639, Supplier 1=Digi-Key, Viewing Angle=120°, Wavelength=525nm, Width=2.8mm
DISPLAY: library part DISPLAY, "2.54mm (0.1\") Pitch SIL Vertical PC Tail Socket Assembly, selective gold + tin, 4 contacts", Case/Package=SIL, Color=Black, Contact Resistance=20mR, Manufacturer 1=Harwin, Max Current Rating=3A, Max Operating Temperature=105°C, Min Operating Temperature=-40°C, Package Quantity=56, Supplier Part Number 1=952-1791-ND, ComponentLink1Description=DATASHEET, ComponentLink1URL=https://eu.mouser.com/datasheet/2/127/dogl128-6e-3984.pdf, ComponentLink2Description="WHERE BUY IT", ComponentLink2URL=https://eu.mouser.com/productdetail/electronic-assembly/ea-led68x51-w?qs=7%252buJNxjmPmV34T7aeje2sQ==, Connector Type=Receptacle,Socket, Contact Gender=Female, Contact Material=Bronze, Contact Plating=Gold,Tin, Depth=2.5mm, Gender=Female, Housing Color=Black, Housing Material=Nylon, Length=10.56mm, Manufacturer Part Number 1=M20-7820442, Mount="Through Hole", Number of Contacts=4, Number of Positions=4, Number of Rows=1, Orientation=Straight, Packaging=Rail/Tube, Pitch=2.54mm, Pricing 1="1=0,81000, 10=0,71400, 100=0,61600, 500=0,50400, 1000=0,44800, 5000=0,39200, 10000=0,37240 (USD)", Radiation Hardening=No, RoHS=Yes, Stock 1=903, Supplier 1=Digi-Key, Termination=Solder, Weight=0.012699oz
J2 J3 J8: library part HEADER, "CONN HEADER VERT 2POS 2.54MM", Color=Black, Current Rating=3A, Flammability Rating="UL94 V-0", Insulation Resistance=5GR, Manufacturer 1="Amphenol FCI", Max Operating Temperature=125°C, Max Voltage Rating (AC)=1.5kV, Min Operating Temperature=-65°C, Package Quantity=100, Supplier Part Number 1=609-3469-ND, Category=Connector, ComponentLink1Description=https://datasheet.ciiva.com/5155/68000-274330-5155060.pdf?src-supplier=Mouser, ComponentLink1URL=https://datasheet.ciiva.com/5155/68000-274330-5155060.pdf?src-supplier=Mouser, ComponentLink2Description=https://datasheet.ciiva.com/16726/68000-16726182.pdf?src-supplier=Avnet+Europe, ComponentLink2URL=https://datasheet.ciiva.com/16726/68000-16726182.pdf?src-supplier=Avnet+Europe, ComponentLink3Description=https://datasheet.ciiva.com/10149/68000-10149336.pdf?src-supplier=Avnet, ComponentLink3URL=https://datasheet.ciiva.com/10149/68000-10149336.pdf?src-supplier=Avnet, ComponentLink4Description=https://datasheet.ciiva.com/731/68000-731070.pdf?src-supplier=Digi-Key, ComponentLink4URL=https://datasheet.ciiva.com/731/68000-731070.pdf?src-supplier=Digi-Key, Connector Type="Male Pin", Contact Gender=Male, Contact Material=Bronze, Contact Mating Length=0.23inch, Contact Plating=Gold,GXT, Contact Post Length=3.05mm, Depth=2.41mm, Gender=Male, Housing Color=Black, Housing Material=Thermoplastic, Length=5.08mm, Manufacturer Part Number 1=68001-202HLF, Mount="Through Hole", Number of Contacts=2, Number of Positions=2, Number of Rows=1, Orientation=Straight, Packaging=Bulk, Pitch=2.54mm, Pricing 1="1=0,24000, 10=0,22100, 100=0,15290, 500=0,12936, 1000=0,10584, 5000=0,09408, 10000=0,08526 (USD)", Radiation Hardening=No, REACH SVHC="No SVHC", RoHS=Yes, Stock 1=39971, Supplier 1=Digi-Key, Termination=Solder, Voltage Rating=1.5kV
J4: library part HEADER_J4, "CONN HEADER R/A 2POS", Case/Package=SMC, Color=Black, Contact Resistance=10mR, Current Rating=5A, Flammability Rating="UL94 V-0", Insulation Resistance=1GR, Manufacturer 1=Molex, Max Operating Temperature=105°C, Max Voltage Rating (DC)=250.25kV, Min Operating Temperature=-40°C, Package Quantity=3168, Supplier Part Number 1=WM1813-ND, Voltage Rating=600V, Voltage Rating (DC)=250V, Approvals=UL,CSA,TUV, ComponentLink1Description=https://datasheet.ciiva.com/14155/04402310-14155203.pdf?src-supplier=Distrelec, ComponentLink1URL=https://datasheet.ciiva.com/14155/04402310-14155203.pdf?src-supplier=Distrelec, ComponentLink2Description=https://datasheet.ciiva.com/19454/883270-19454006.pdf?src-supplier=Jameco, ComponentLink2URL=https://datasheet.ciiva.com/19454/883270-19454006.pdf?src-supplier=Jameco, ComponentLink3Description=https://datasheet.ciiva.com/5150/0430450200-pcb-headers-145770-5150407.pdf?src-supplier=Mouser, ComponentLink3URL=https://datasheet.ciiva.com/5150/0430450200-pcb-headers-145770-5150407.pdf?src-supplier=Mouser, ComponentLink4Description=https://datasheet.ciiva.com/11747/0900766b80027348-11747001.pdf?src-supplier=RSComponents, ComponentLink4URL=https://datasheet.ciiva.com/11747/0900766b80027348-11747001.pdf?src-supplier=RSComponents, ComponentLink5Description=https://datasheet.ciiva.com/16656/0430450200-pcb-headers-16656330.pdf?src-supplier=Avnet+Europe, ComponentLink5URL=https://datasheet.ciiva.com/16656/0430450200-pcb-headers-16656330.pdf?src-supplier=Avnet+Europe, ComponentLink6Description=https://datasheet.ciiva.com/10090/0430450200-pcb-headers-10090299.pdf?src-supplier=Avnet, ComponentLink6URL=https://datasheet.ciiva.com/10090/0430450200-pcb-headers-10090299.pdf?src-supplier=Avnet, ComponentLink7Description=https://datasheet.ciiva.com/36854/124280430450200-pcb-headers-36854331.pdf?src-supplier=Onlinecomponents.com, ComponentLink7URL=https://datasheet.ciiva.com/36854/124280430450200-pcb-headers-36854331.pdf?src-supplier=Onlinecomponents.com, ComponentLink8Description=https://datasheet.ciiva.com/1443/1859921-1443437.pdf?src-supplier=Element14, ComponentLink8URL=https://datasheet.ciiva.com/1443/1859921-1443437.pdf?src-supplier=Element14, Contact Gender=Male, Contact Material=Brass,Tin, Contact Plating=Tin, Diameter=3mm, Gender=Male, Glow Wire Compliant=Compliant, Halogen Free="Low Halogen", Housing Color=Black, Housing Material=Thermoplastic, Lead Free="Lead Free", Manufacturer Part Number 1=43045-0200, Material=Thermoplastic, Mount="Through Hole", Number of Circuits=2, Number of Contacts=2, Number of Positions=2, Number of Rows=2, Orientation="Right Angle", Packaging=Tray, Pitch=3mm, Pricing 1="1=0,97000, 10=0,84900, 100=0,73280, 500=0,59958, 1000=0,53296, 5000=0,46634, 10000=0,44302 (USD)", Radiation Hardening=No, REACH SVHC=Unknown, RoHS=Yes, Row Spacing=3mm, Stock 1=6359, Supplier 1=Digi-Key, Termination="Through Hole"
J5: library part HEADER_J5, "NANO-FIT RIGHT ANGLE HEADER, TH", Insulation Color=Black, Manufacturer 1=Molex, Max Operating Temperature=105°C, Min Operating Temperature=-40°C, Supplier Part Number 1=WM16907-ND, ComponentLink1Description=https://www.molex.com/pdm_docs/ps/PS-105300-100-001.pdf?src-supplier=Digi-Key, ComponentLink1URL=https://www.molex.com/pdm_docs/ps/PS-105300-100-001.pdf?src-supplier=Digi-Key, Connector Type="Header,Male Pin", Contact Material=Brass, Contact Plating=Tin, Contact Shape=Square, Fastening Type=Latch, Insulation Material=Polymer, Manufacturer Part Number 1=1053141104, Mount="Through Hole", Number of Positions=4, Number of Rows=2, Packaging=Tray, Pricing 1="1=1,08000, 10=0,95100, 300=0,74580, 600=0,67122, 1200=0,59664, 5100=0,52206, 10200=0,49596 (USD)", RoHS=No, Stock 1=1022, Supplier 1=Digi-Key, Termination=Solder
J6: library part HEADER_J6, "CONN HEADER R/A 8POS 3MM", Case/Package=SMC, Color=Black, Contact Resistance=10mR, Current Rating=5A, Flammability Rating="UL94 V-0", Insulation Resistance=1GR, Manufacturer 1=Molex, Max Operating Temperature=105°C, Max Voltage Rating (DC)=250.25kV, Min Operating Temperature=-40°C, Package Quantity=1440, Supplier Part Number 1=WM1816-ND, Voltage Rating=600V, Voltage Rating (AC)=250V, Approvals=UL,CSA,TUV, ComponentLink1Description=https://datasheet.ciiva.com/5158/0430450800-pcb-headers-142625-5158817.pdf?src-supplier=Mouser, ComponentLink1URL=https://datasheet.ciiva.com/5158/0430450800-pcb-headers-142625-5158817.pdf?src-supplier=Mouser, ComponentLink2Description=https://datasheet.ciiva.com/7683/27645-7683683.pdf?src-supplier=Element14, ComponentLink2URL=https://datasheet.ciiva.com/7683/27645-7683683.pdf?src-supplier=Element14, ComponentLink3Description=https://datasheet.ciiva.com/19462/883536-19462164.pdf?src-supplier=Jameco, ComponentLink3URL=https://datasheet.ciiva.com/19462/883536-19462164.pdf?src-supplier=Jameco, ComponentLink4Description=https://datasheet.ciiva.com/11751/0900766b80027348-11751142.pdf?src-supplier=RSComponents, ComponentLink4URL=https://datasheet.ciiva.com/11751/0900766b80027348-11751142.pdf?src-supplier=RSComponents, ComponentLink5Description=https://datasheet.ciiva.com/30198/267770430450800-pcb-headers-30198875.pdf?src-supplier=Onlinecomponents.com, ComponentLink5URL=https://datasheet.ciiva.com/30198/267770430450800-pcb-headers-30198875.pdf?src-supplier=Onlinecomponents.com, ComponentLink6Description=https://datasheet.ciiva.com/1443/1850016-1443537.pdf?src-supplier=Element14, ComponentLink6URL=https://datasheet.ciiva.com/1443/1850016-1443537.pdf?src-supplier=Element14, ComponentLink7Description=https://datasheet.ciiva.com/14155/04402310-14155206.pdf?src-supplier=Distrelec, ComponentLink7URL=https://datasheet.ciiva.com/14155/04402310-14155206.pdf?src-supplier=Distrelec, ComponentLink8Description=https://datasheet.ciiva.com/16657/0430450800-pcb-headers-16657964.pdf?src-supplier=Avnet+Europe, ComponentLink8URL=https://datasheet.ciiva.com/16657/0430450800-pcb-headers-16657964.pdf?src-supplier=Avnet+Europe, ComponentLink9Description=https://datasheet.ciiva.com/10087/0430450800-pcb-headers-10087853.pdf?src-supplier=Avnet, ComponentLink9URL=https://datasheet.ciiva.com/10087/0430450800-pcb-headers-10087853.pdf?src-supplier=Avnet, Contact Material=Brass,Tin, Contact Plating=Tin, Depth=12.2mm, Diameter=3mm, Gender=Male, Glow Wire Compliant=Compliant, Halogen Free="Low Halogen", Height=8.77mm, Housing Color=Black, Housing Material=Thermoplastic, Lead Free="Lead Free", Length=16.15mm, Manufacturer Part Number 1=43045-0800, Material=Polyester, Max Current Rating=5A, Mount="Through Hole", Number of Circuits=8, Number of Contacts=8, Number of Poles=8, Number of Positions=8, Number of Rows=2, Orientation="Right Angle", Packaging=Tray, Pitch=3mm, Pricing 1="1=1,91000, 10=1,73100, 100=1,48390, 500=1,23656, 1000=1,05990, 5000=0,93978, 10000=0,91858 (USD)", Radiation Hardening=No, REACH SVHC=Unknown, RoHS=Yes, Row Spacing=3mm, Stock 1=1548, Supplier 1=Digi-Key, Termination=Solder, Voltage Rating (DC)=250V, Working Voltage=250V
J7: library part HEADER_J7, "Conn Power HDR 8 POS 2.5mm Solder RA Thru-Hole 8 Terminal 1 Port Nano-Fit Tray", Insulation Color=Black, Manufacturer 1=Molex, Max Operating Temperature=105°C, Min Operating Temperature=-40°C, Supplier Part Number 1=WM16909-ND, ComponentLink1Description=Datasheet, ComponentLink1URL=https://www.molex.com/pdm_docs/sd/1053141108_sd.pdf?src-supplier=Digi-Key, ComponentLink2Description=INFO, ComponentLink2URL=https://www.molex.com/molex/products/part-detail/pcb_headers/1053141108, Connector Type="Header,Male Pin", Contact Material=Brass, Contact Plating=Tin, Contact Shape=Square, Fastening Type=Latch, Insulation Material=Polymer, Manufacturer Part Number 1=105314-1108, Mount="Through Hole", Number of Positions=8, Number of Rows=2, Packaging=Tray, Pricing 1="1=1,71000, 10=1,55200, 156=1,33013, 624=1,10845, 1092=0,95010, 5148=0,84242, 10140=0,82342 (USD)", RoHS=No, Stock 1=846, Supplier 1=Digi-Key, Termination=Solder